# EAGLE board HC16_BUS_BOARD_V1 (EAGLE 6.4)

Size 76.18 x 96.83 mm. Coordinates in mm from the lower left corner, seen from the top.
Outline: 0,0 76.18,0 76.18,96.83 0,96.83 0,0
Copper layers (1*16): Top 0.035mm / dielectric 1.5mm / Bottom 0.035mm
Design rules "default": minimum track width 10mil, minimum drill 24mil, track to track 8mil, track to pad 8mil, pad to pad 8mil, via to via 8mil, smd to smd 8mil, copper to edge 40mil, drill to drill 8mil, minimum pad ring 10mil, minimum via ring 8mil, stop-mask expansion 4mil, vias tented up to drill 0mil, thermal gap 10mil

## Footprints (pad centres in the part's own frame; a part is rotated, then mirrored left to right if it is on the bottom)
DO41-10 = drill 1.118: A 5.08,0; C -5.08,0
22-23-2021 = drill 1 long: 1 -1.27,0; 2 1.27,0
61202022021 = drill 1.1: 1 5.08,1.27; 2 5.08,-1.27; 3 2.54,1.27; 4 2.54,-1.27; 5 0,1.27; 6 0,-1.27; 7 -2.54,1.27; 8 -2.54,-1.27; 9 -5.08,1.27; 10 -5.08,-1.27; 11 -7.62,1.27; 12 -7.62,-1.27; 13 -10.16,1.27; 14 -10.16,-1.27; 15 -12.7,1.27; 16 -12.7,-1.27; 17 -15.24,1.27; 18 -15.24,-1.27; 19 -17.78,1.27; 20 -17.78,-1.27
SSOP24 = smd 0.348 x 1.397: 1 -3.575,-3.656; 2 -2.925,-3.656; 3 -2.275,-3.656; 4 -1.625,-3.656; 5 -0.975,-3.656; 6 -0.325,-3.656; 7 0.325,-3.656; 8 0.975,-3.656; 9 1.625,-3.656; 10 2.275,-3.656; 11 2.925,-3.656; 12 3.575,-3.656; 13 3.575,3.656; 14 2.925,3.656; 15 2.275,3.656; 16 1.625,3.656; 17 0.975,3.656; 18 0.325,3.656; 19 -0.325,3.656; 20 -0.975,3.656; 21 -1.625,3.656; 22 -2.275,3.656; 23 -2.925,3.656; 24 -3.575,3.656
TO220AH = drill 1.118 long: B -2.54,-6.35; C 0,-6.35; E 2.54,-6.35 | hole 3.302: 0,11.176
0204/7 = drill 0.813 octagon: 1 -3.81,0; 2 3.81,0
61201622021 = drill 1.1: 1 5.08,1.27; 2 5.08,-1.27; 3 2.54,1.27; 4 2.54,-1.27; 5 0,1.27; 6 0,-1.27; 7 -2.54,1.27; 8 -2.54,-1.27; 9 -5.08,1.27; 10 -5.08,-1.27; 11 -7.62,1.27; 12 -7.62,-1.27; 13 -10.16,1.27; 14 -10.16,-1.27; 15 -12.7,1.27; 16 -12.7,-1.27

## Placement (x,y rotation side)
D1  1N4004  [DO41-10]  15.24,86.36 270 top
D2  1N4004  [DO41-10]  15.24,63.5 270 top
D3  1N4004  [DO41-10]  15.24,40.64 270 top
D4  1N4004  [DO41-10]  15.24,17.78 270 top
FAN1  22-23-2021  [22-23-2021]  5.08,82.55 270 top
FAN2  22-23-2021  [22-23-2021]  5.08,59.69 270 top
FAN3  22-23-2021  [22-23-2021]  5.08,36.83 270 top
FAN4  22-23-2021  [22-23-2021]  5.08,13.97 270 top
FROM_SENSOR_TOP  61202022021  [61202022021]  58.42,88.9 0 top
MULTIPLEX_1  MUX-74HC4067SMD  [SSOP24]  63.5,53.34 270 top
Q1  TIP120  [TO220AH]  27.94,83.82 270 top
Q2  TIP120  [TO220AH]  27.94,60.96 270 top
Q3  TIP120  [TO220AH]  27.94,38.1 270 top
Q4  TIP120  [TO220AH]  27.94,15.24 270 top
R1  2.2k  [0204/7]  27.94,91.44 0 top
R2  2.2k  [0204/7]  27.94,68.58 0 top
R3  2.2k  [0204/7]  27.94,45.72 0 top
R4  2.2k  [0204/7]  27.94,22.86 0 top
TO_MB_16PIN  61201622021  [61201622021]  55.88,8.89 0 top

## Library data of the parts
D1-D4 = diode
FAN1-FAN4 = con-molex; MF: MOLEX; MPN: 22-23-2021; OC_FARNELL: 1462926; OC_NEWARK: 25C3832
FROM_SENSOR_TOP TO_MB_16PIN = Wuerth_Elektronik_eiCan_05_Box_Header_IDC_Connectors_1_2
MULTIPLEX_1 = SparkFun-AnalogIC
Q1-Q4 = transistor-power
R1-R4 = rcl

## Nets
+3V3: FROM_SENSOR_TOP.2 MULTIPLEX_1.24 TO_MB_16PIN.11
+12V: D1.C D2.C D3.C FAN1.1 FAN2.1 FAN3.1 TO_MB_16PIN.13
DIG1: MULTIPLEX_1.10 TO_MB_16PIN.2
DIG2: MULTIPLEX_1.11 TO_MB_16PIN.4
DIG3: MULTIPLEX_1.14 TO_MB_16PIN.6
DIG4: MULTIPLEX_1.13 TO_MB_16PIN.8
GND: FROM_SENSOR_TOP.1 MULTIPLEX_1.12 MULTIPLEX_1.15 Q1.E Q2.E Q3.E Q4.E TO_MB_16PIN.15
MUX1: MULTIPLEX_1.1 TO_MB_16PIN.16
N$1: D1.A FAN1.2 Q1.C
N$2: D2.A FAN2.2 Q2.C
N$4: Q1.B R1.1
N$5: Q2.B R2.1
N$6: D3.A FAN3.2 Q3.C
N$7: D4.A FAN4.2 Q4.C
N$8: D4.C FAN4.1
N$10: Q4.B R4.1
N$13: Q3.B R3.1
N$26: FROM_SENSOR_TOP.19
N$27: FROM_SENSOR_TOP.20
PHOTO1: FROM_SENSOR_TOP.3 MULTIPLEX_1.9
PHOTO2: FROM_SENSOR_TOP.5 MULTIPLEX_1.8
PHOTO3: FROM_SENSOR_TOP.7 MULTIPLEX_1.7
PHOTO4: FROM_SENSOR_TOP.9 MULTIPLEX_1.6
PHOTO5: FROM_SENSOR_TOP.11 MULTIPLEX_1.5
PHOTO6: FROM_SENSOR_TOP.13 MULTIPLEX_1.4
PHOTO7: FROM_SENSOR_TOP.15 MULTIPLEX_1.3
PHOTO8: FROM_SENSOR_TOP.17 MULTIPLEX_1.2
PHOTO9: FROM_SENSOR_TOP.4 MULTIPLEX_1.23
PHOTO10: FROM_SENSOR_TOP.6 MULTIPLEX_1.22
PHOTO11: FROM_SENSOR_TOP.8 MULTIPLEX_1.21
PHOTO12: FROM_SENSOR_TOP.10 MULTIPLEX_1.20
PHOTO13: FROM_SENSOR_TOP.12 MULTIPLEX_1.19
PHOTO14: FROM_SENSOR_TOP.14 MULTIPLEX_1.18
PHOTO15: FROM_SENSOR_TOP.16 MULTIPLEX_1.17
PHOTO16: FROM_SENSOR_TOP.18 MULTIPLEX_1.16
PWM_FAN1: R1.2 TO_MB_16PIN.1
PWM_FAN2: R2.2 TO_MB_16PIN.3
PWM_FAN3: R3.2 TO_MB_16PIN.5
PWM_FAN4: R4.2 TO_MB_16PIN.7

## Tracks (layer width: path | path; a pad name or v marks a point on that pad's centre or on a via)
+3V3  (2 unrouted)
+12V  (6 unrouted)
DIG1  (1 unrouted)
DIG2  (1 unrouted)
DIG3  (1 unrouted)
DIG4  (1 unrouted)
GND  (7 unrouted)
MUX1  (1 unrouted)
N$1  (2 unrouted)
N$2  (2 unrouted)
N$4  (1 unrouted)
N$5  (1 unrouted)
N$6  (2 unrouted)
N$7  (2 unrouted)
N$8  (1 unrouted)
N$10  (1 unrouted)
N$13  (1 unrouted)
PHOTO1  (1 unrouted)
PHOTO2  (1 unrouted)
PHOTO3  (1 unrouted)
PHOTO4  (1 unrouted)
PHOTO5  (1 unrouted)
PHOTO6  (1 unrouted)
PHOTO7  (1 unrouted)
PHOTO8  (1 unrouted)
PHOTO9  (1 unrouted)
PHOTO10  (1 unrouted)
PHOTO11  (1 unrouted)
PHOTO12  (1 unrouted)
PHOTO13  (1 unrouted)
PHOTO14  (1 unrouted)
PHOTO15  (1 unrouted)
PHOTO16  (1 unrouted)
PWM_FAN1  (1 unrouted)
PWM_FAN2  (1 unrouted)
PWM_FAN3  (1 unrouted)
PWM_FAN4  (1 unrouted)